# Altium PCB HV_Boost.PcbDoc
Units mil, origin at the board's own origin, x right, y up, seen from the top; angles counter-clockwise.
Board outline 7300 x 2800 mil, 4 copper layers (Power, Signal 1, Signal 2, GND), stack 23.756 mil thick; 60 components, 93 nets, 317 pads, 50 vias.
Unrouted connection lines stored in the file: 51.
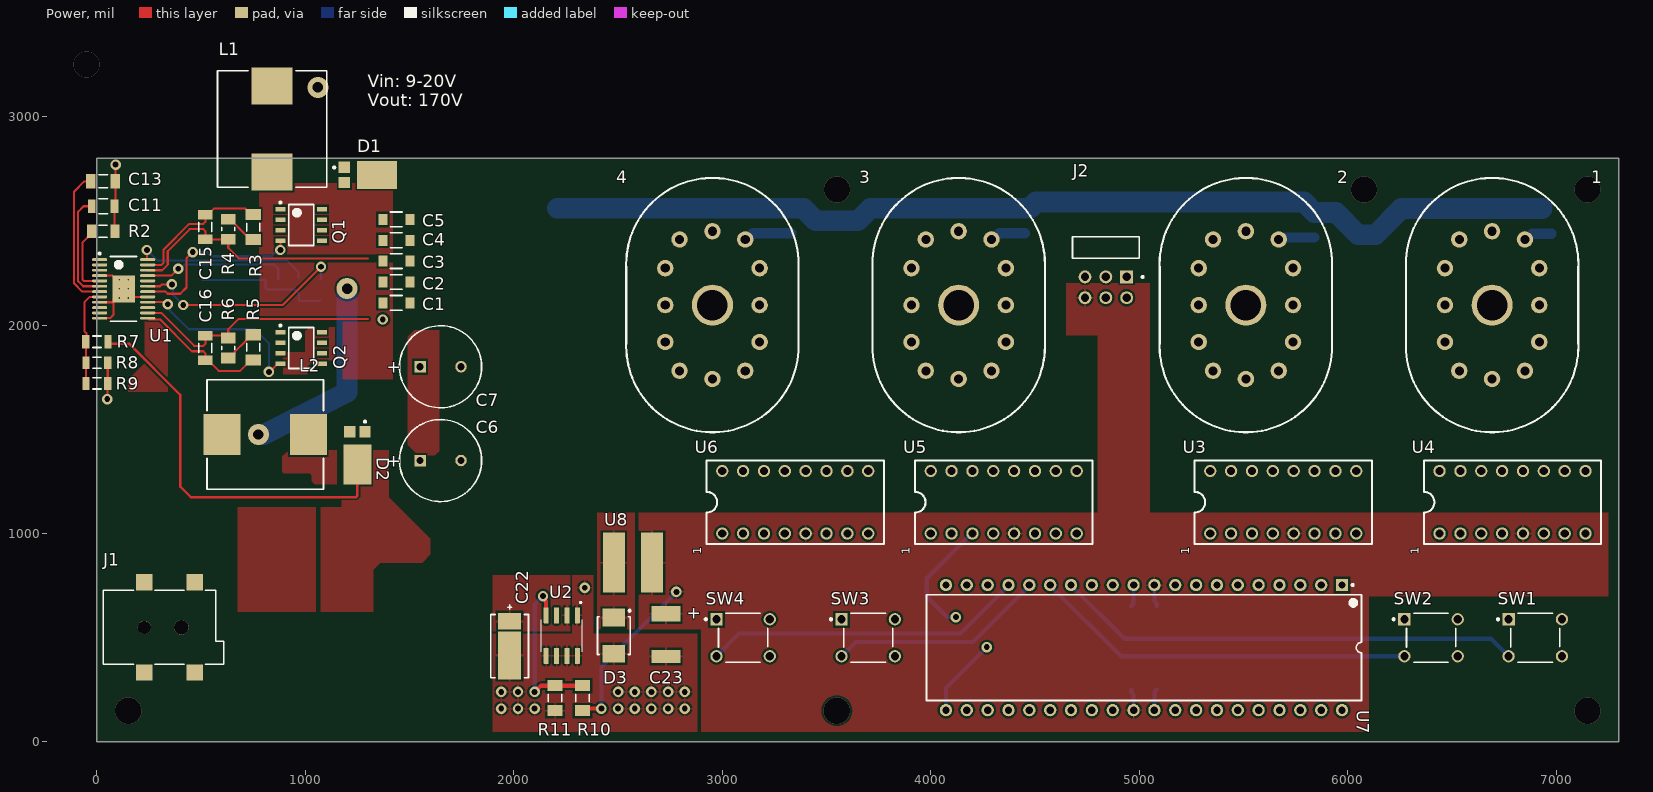
[diagram p0: Power view]
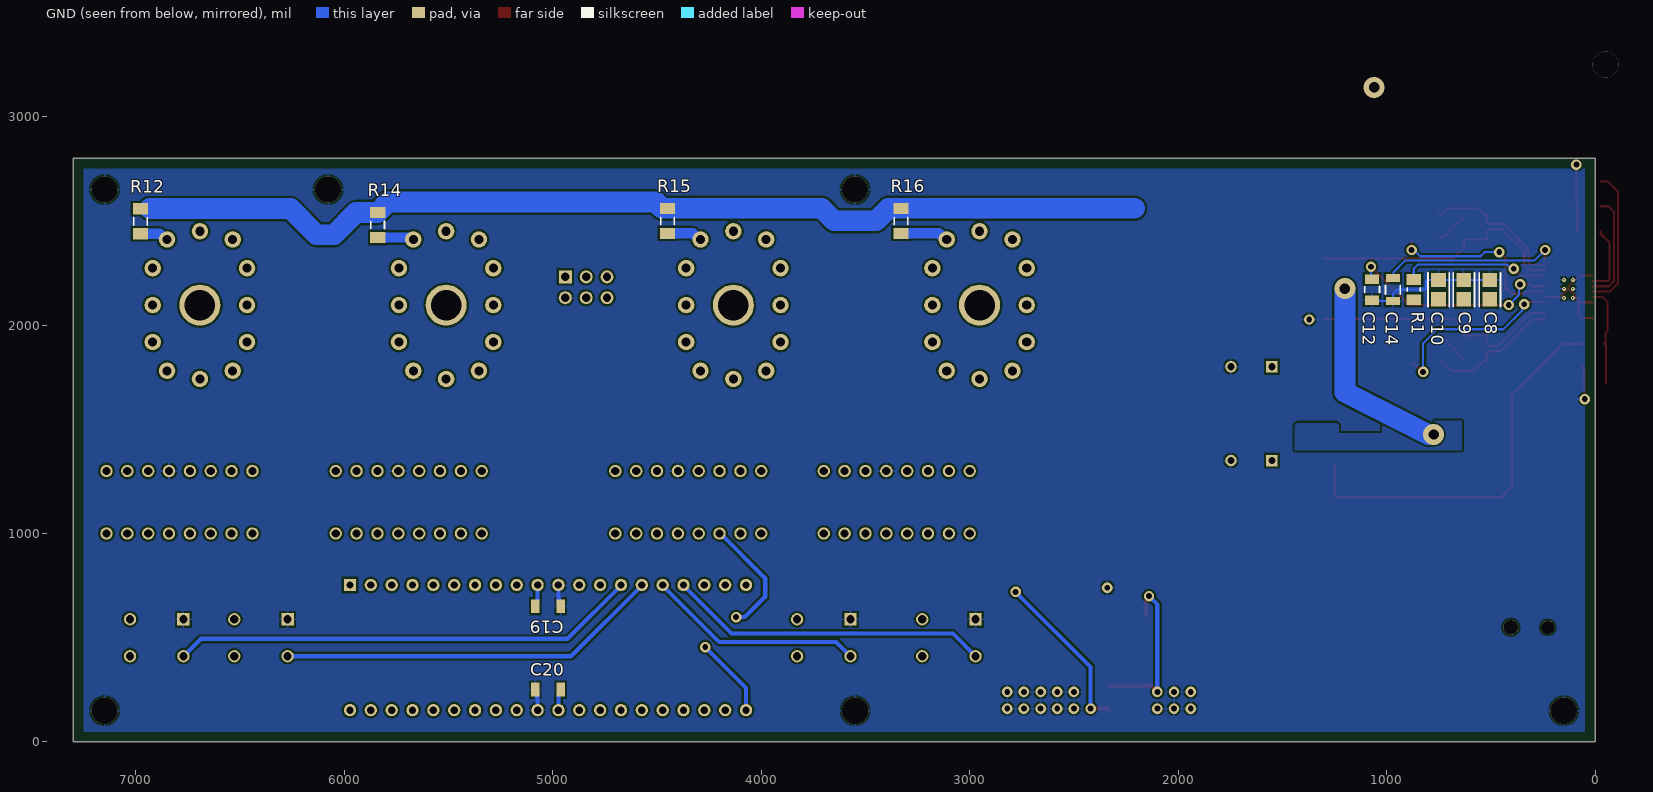
[diagram p1: GND view, seen from below]
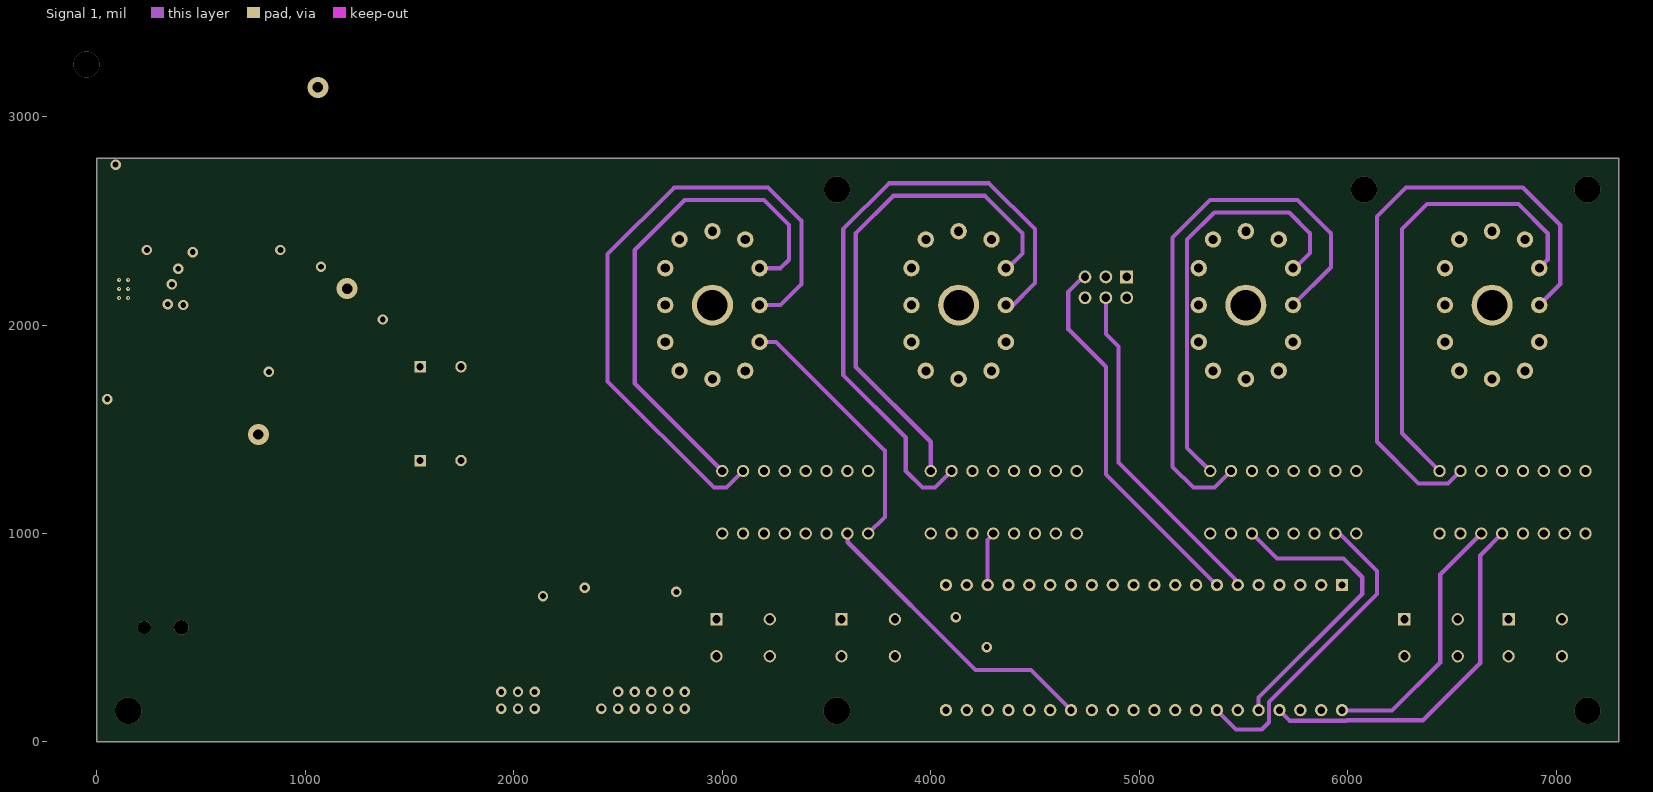
[diagram p2: Signal 1]
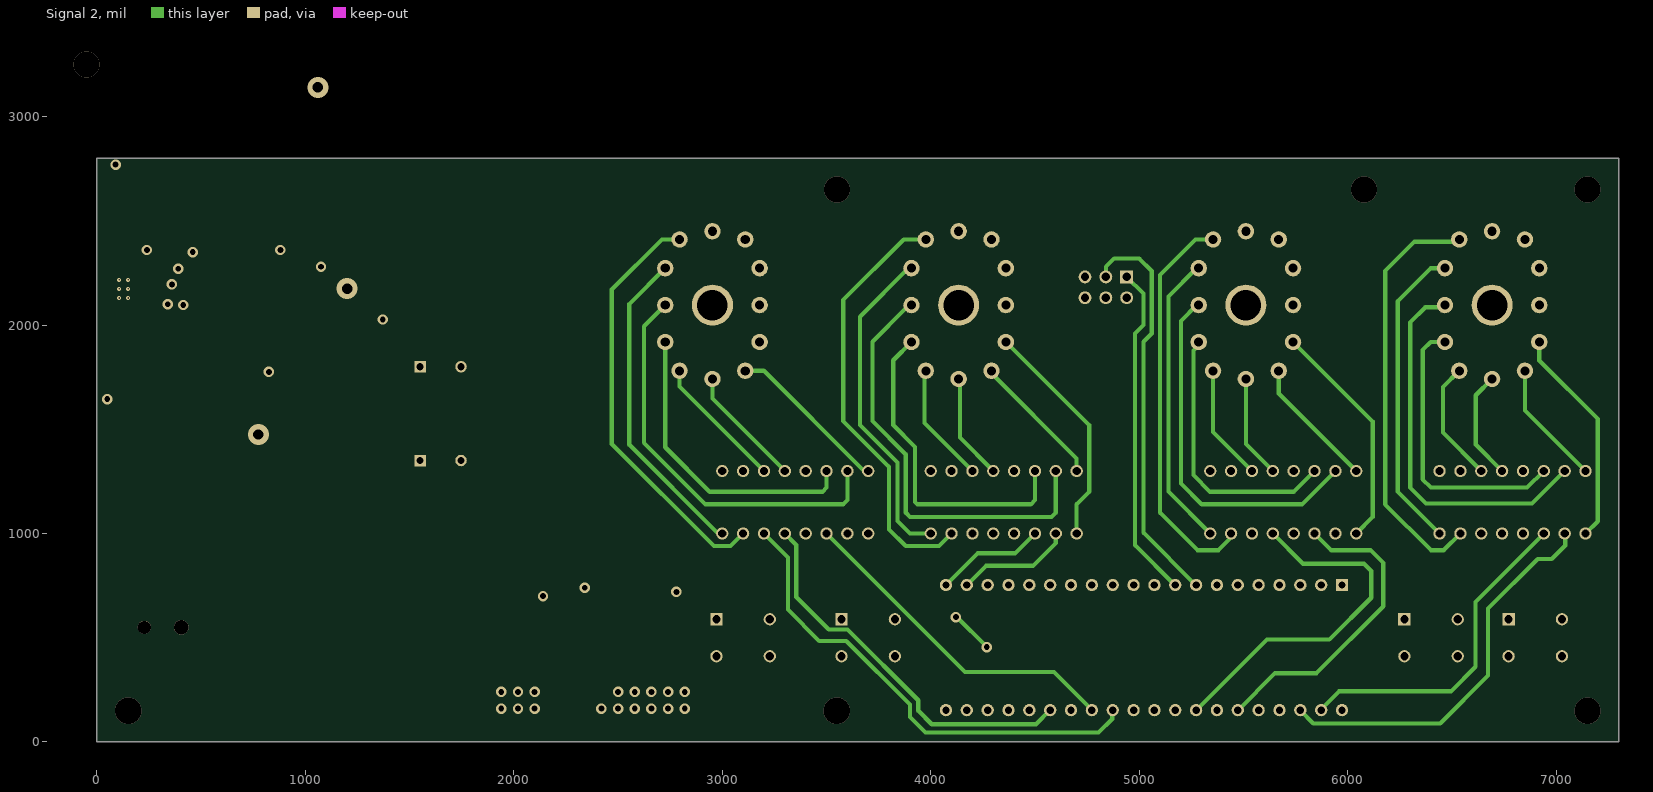
[diagram p3: Signal 2]
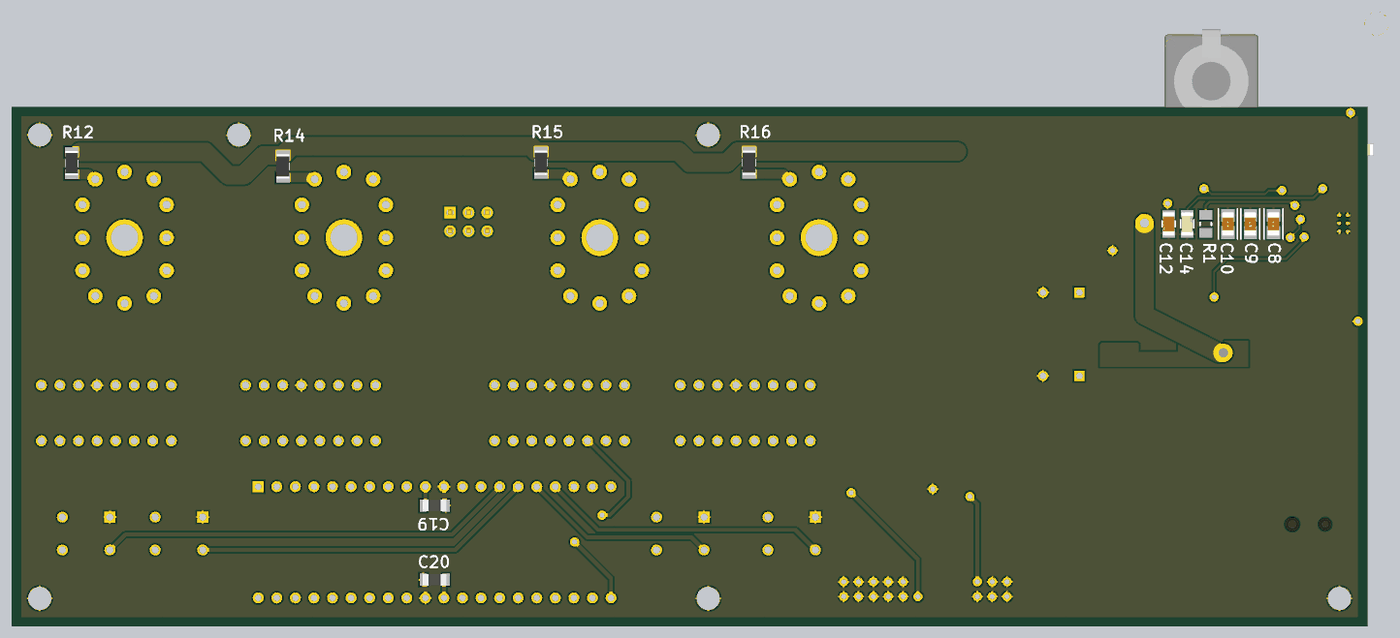
[diagram p4: 3D render of the assembled board from below, using the file's embedded part models]

## Layer stack, top to bottom
Top Solder: solder mask 0.4, Solder Resist, Dk 3.5
Power: signal copper 1.4
Dielectric 2: prepreg 2.8, PP-006, Dk 4.1
Signal 1: signal copper 1.378
Dielectric 1: dielectric 12.6, FR-4, Dk 4.8
Signal 2: signal copper 1.378
Dielectric 3: prepreg 2.8, PP-006, Dk 4.1
GND: signal copper 1.4
Bottom Solder: solder mask 0.4, Solder Resist, Dk 3.5

## Board outline
0,0 7300,0 7300,2800 0,2800

## Design rules (kind name [scope] priority, off if disabled: settings)
Clearance [All] p1: gap=10 ignorepadtopadclearanceinfootprint=FALSE except(0: Arc-Hole Track-Hole SMDPad-Hole THPad-Hole Via-Hole Fill-Hole Poly-Hole Region-Hole Text-Hole)
PolygonConnect [All] p1: connectstyle=Relief reliefconductorwidth=10 reliefentries=4 polygonreliefangle="90 Angle" airgapwidth=10
RoutingVias [All] p1: holewidth=28 width=50 viastyle="Through Hole" minholewidth=28 minwidth=50 maxholewidth=28 maxwidth=50
SolderMaskExpansion [All] p1: expansion=4 istentingtop=FALSE
Width [All] p1: maxlimit=100 minlimit=10 preferedwidth=10
30 further rules are at their usual default settings.

## Classes and differential pairs
component class TPS5402: C22 C23 D3 R10 R11 U2 U8
component class Buttons: SW1 SW2 SW3 SW4
component class ATMega1284p: C19 C20 U7
component class IN_12A: 1 2 3 4 R12 R14 R15 R16 U3 U4 U5 U6
component class LTC3862-2: C1 C2 C3 C4 C5 C6 C7 C8 C9 C10 C11 C12 C13 C14 C15 C16 D1 D2 L1 L2 Q1 Q2 R1 R2 R3 R4 R5 R6 R7 R8 R9 U1
component class Connectors: J1 J2

## Components (designator, comment, footprint, x,y, rotation, side; value= is the part's Value field where it differs from the comment)
1 "IN-12A" IN-12A 6692.91,2095.67 r0 top locked
2 "IN-12A" IN-12A 5511.81,2095.67 r0 top locked
3 "IN-12A" IN-12A 4133.86,2095.67 r0 top locked
4 "IN-12A" IN-12A 2952.76,2095.67 r0 top locked
C1 "6.8uF" FP-C3216-160-0_2-MFG 1436.61,2106.57 r180 top
C2 "6.8uF" FP-C3216-160-0_2-MFG 1436.61,2206.57 r180 top
C3 "6.8uF" FP-C3216-160-0_2-MFG 1436.61,2306.57 r180 top
C4 "6.8uF" FP-C3216-160-0_2-MFG 1436.61,2406.57 r180 top
C5 "6.8uF" FP-C3216-160-0_2-MFG 1436.61,2506.57 r180 top
C6 "ECA-2DM101" CAPPR65-500-1600X1000X1700 1648.43,1350 r0 top value=100µF
C7 "ECA-2DM101" CAPPR65-500-1600X1000X1700 1648.43,1800 r0 top value=100µF
C8 "6.8uF" FP-C3216-160-0_2-IPC_B 505,2170 r90 bottom
C9 "6.8uF" FP-C3216-160-0_2-IPC_B 630,2170 r90 bottom
C10 "6.8uF" FP-C3216-160-0_2-IPC_B 750.49,2170 r90 bottom
C11 "0.002uF" FP-C1206C-EB-MFG 30,2570 r180 top value="2,000 pF"
C12 "4.7uF" FP-GRM31C-0_2-e0_3_0_8-IPC_C 1070,2170 r270 bottom
C13 "CAP 10nF 100V" CAPC1206(3216)170_N 30,2690 r0 top value=10nF
C14 "0.001uF" FP-C1206C-EB-MFG 970,2170 r270 bottom value="1,000 pF"
C15 "CAP 10nF 500V 1206" CAPC1206(3216)170_N 520,2470 r270 top value=10nF
C16 "CAP 10nF 500V 1206" CAPC1206(3216)170_N 520,1890 r90 top value=10nF
C19 "Capacitor - 0.1uF - 1206" FOOTPRINT-1206-GEN 5023,651 r0 bottom value=0.1uF
C20 "Capacitor - 0.1uF - 1206" FOOTPRINT-1206-GEN 5023,251 r180 bottom value=0.1uF
C22 "47uF" FP-T528Z477M2R5ATE008-MFG 1980,460 r90 top
C23 "595D107X06R3C2T" 595D107X06R3C2T 2730,410 r0 top
D1 "PDS760-13" DIOD-POWERDI5-3_V 1300,2720 r0 top
D2 "PDS760-13" DIOD-POWERDI5-3_V 1250,1375 r270 top
D3 "SS22T3G" ONSC-SMB-2-403A-03_V 2480,510 r270 top
J1 "694106106102" 694106106102 300,550 r270 top
J2 "M20-9950345" FP-M20-9950345-MFG 4840,2370 r180 top locked
L1 "7443551181" WE-HCI-1365 840,2940 r270 top
L2 "7443551181" WE-HCI-1365 807.47,1475 r0 top
Q1 "SI4840DY-T1-E3" VISH-SOIC-8_A_V 980,2480 r0 top
Q2 "SI4840DY-T1-E3" VISH-SOIC-8_A_V 980,1890 r0 top
R1 "0 Ohm" RESC3216X89X64LL25T25 870,2170 r90 bottom
R2 "66.5k" RESC3216X70X50NL05T20 30,2450 r180 top
R3 "10" FP-CRCW1206-e3-IPC_A 750,2470 r270 top
R4 "0.005" RESC3216X89X64LL25T25 630,2460 r90 top
R5 "10" FP-CRCW1206-e3-IPC_A 750,1893.1 r90 top
R6 "0.005" RESC3216X89X64LL25T25 630,1890 r270 top
R7 "475k" RESC3216X60X45LL10T20 0,1920 r0 top
R8 "3.48k" RESC3216X70X50LL05T20 0,1819.51 r180 top
R9 "DNP" RESC3216X70X50LL05T20 0,1720 r180 top
R10 "Resistor 3.01k +/-1% 1206 250 mW" RESC3216X60X45ML15T20 2330,210 r270 top value=3.01k
R11 "Resistor 976 +/-1% 1206 250 mW" RESC3216X60X45ML15T20 2198.07,210 r90 top value=976
R12 "Resistor 80k +/-1% 1206 250 mW" RESC3216X60X45ML15T20 6978,2498 r90 bottom value=80k
R14 "Resistor 80k +/-1% 1206 250 mW" RESC3216X60X45ML15T20 5840,2480 r90 bottom value=80k
R15 "Resistor 80k +/-1% 1206 250 mW" RESC3216X60X45ML15T20 4450,2500 r90 bottom value=80k
R16 "Resistor 80k +/-1% 1206 250 mW" RESC3216X60X45ML15T20 3330,2500 r90 bottom value=80k
SW1 "1825910-6" TECO-1825910-6_V 6900,500 r0 top
SW2 "1825910-6" TECO-1825910-6_V 6400,500 r0 top
SW3 "1825910-6" TECO-1825910-6_V 3700,500 r0 top
SW4 "1825910-6" TECO-1825910-6_V 3100,500 r0 top
U1 "LTC3862EFE-1#PBF" LT-FE-24-EPV-AA_M 128.35,2173.31 r0 top
U2 "MIC4690YM-TR" TPS5402 2230,510 r270 top
U3 "K155ID1" Socket_DIP_16 5341.02,1000 r90 top
U4 "K155ID1" Socket_DIP_16 6441.02,1000 r90 top
U5 "K155ID1" Socket_DIP_16 4000,1000 r90 top
U6 "K155ID1" Socket_DIP_16 3000,1000 r90 top
U7 "ATmega1284P-PU" 40P6 5023,452.8 r270 top
U8 "CDRH6D38NP-180NC" CDRH6D38NP-180NC 2480,860 r0 top

## Footprints (in the part's own frame and the unit in brackets; to place one, negate y for a bottom-side part, rotate by r counter-clockwise, add the part's x,y. Pads: shape width x height; smd on the part's side, far side on the other; paste and mask are expansions set on the pad)
40P6 [mm] "40-Pin Ceramic Dual In-Line Package (CerDIP)"
  rect 1.5x1.5 hole 0.9: 1(-7.62,24.13)
  round 1.5 hole 0.9: 2(-7.62,21.59) 3(-7.62,19.05) 4(-7.62,16.51) 5(-7.62,13.97) 6(-7.62,11.43) 7(-7.62,8.89) 8(-7.62,6.35) 9(-7.62,3.81) 10(-7.62,1.27) 11(-7.62,-1.27) 12(-7.62,-3.81) 13(-7.62,-6.35) 14(-7.62,-8.89) 15(-7.62,-11.43) 16(-7.62,-13.97) 17(-7.62,-16.51) 18(-7.62,-19.05) 19(-7.62,-21.59) 20(-7.62,-24.13) 21(7.62,-24.13) 22(7.62,-21.59) 23(7.62,-19.05) 24(7.62,-16.51) 25(7.62,-13.97) 26(7.62,-11.43) 27(7.62,-8.89) 28(7.62,-6.35) 29(7.62,-3.81) 30(7.62,-1.27) 31(7.62,1.27) 32(7.62,3.81) 33(7.62,6.35) 34(7.62,8.89) 35(7.62,11.43) 36(7.62,13.97) 37(7.62,16.51) 38(7.62,19.05) 39(7.62,21.59) 40(7.62,24.13)
  silkscreen extent -7.74,-26.5 6.45,26.5, body extent -7.05,-26.47 7.05,26.47, height 5.72
595D107X06R3C2T [mm]
  rect 3.5x1.9 smd: 1(0,5.2)
  rect 3.5x1.6 smd: 2(0,0)
  body extent -1.73,-0.79 1.73,6.12, height 3
694106106102 [mm] "DC Power Jack Right Angled SMT ?6.4 with 4 soldering pads & pegs"
  rect 2x2 smd: 1(-5.5,4.3) 1(-5.5,-1.85) 2(5.5,-1.85) 3(5.5,4.3)
  round 1.6 hole 1.6 unplated: MH1(0,-1.85)
  round 1.8 hole 1.8 unplated: MH2(0,2.65)
  silkscreen extent -4.5,-6.85 4.5,7.85, body extent -6.25,-6.85 6.25,7.85, height 11.05
CAPC1206(3216)170_N [mm] "Chip Capacitor, Body 3.2x1.6mm, Height 1.7mm, IPC Medium Density"
  rect 1.15x1.8 smd: 1(-1.5,0) 2(1.5,0)
  silkscreen extent -0.55,-0.8 0.55,0.8, body extent -1.7,-0.9 1.7,0.9, height 1.7
CAPPR65-500-1600X1000X1700 [mm] "THD, 2-Leads, Dia 10mm, Body Length 16mm"
  rect 1.4x1.4 hole 0.9: 1(-2.5,0)
  round 1.4 hole 0.9: 2(2.5,0)
  silkscreen extent -5,-5 5,5, body extent -5,-5 4.95,5, height 17
CDRH6D38NP-180NC [mm]
  rect 2.65x7.3 smd: 1(0,0) 2(4.65,0)
  body extent -1.3,-3.63 5.94,3.63, height 4
DIOD-POWERDI5-3_V [mm] "SMD, 3-Leads, Body 3.975x5.375mm, Pitch 1.84mm"
  rect 1.4x1.39 smd: 1(-2.856,0.92) 2(-2.856,-0.92)
  rect 4.86x3.36 smd: 3(1.126,0)
  silkscreen extent -4.23,0.8 -3.98,1.04, body extent -2.69,-1.99 2.69,1.99, height 1.15
FOOTPRINT-1206-GEN [mm] "1/4 Watt"
  rect 1x1.7 smd: 1(-1.55,0) 2(1.55,0)
  body extent -1.6,-0.8 1.6,0.8, height 0.71
FP-C1206C-EB-MFG [mm]
  rect 0.95x1.7 smd paste+0 mask+0: 1(-1.4,0) 2(1.4,0)
  silkscreen extent -0.55,-0.9 0.55,0.9, body extent -2,-1 2,1, height 0.25
FP-C3216-160-0_2-IPC_B [mil]
  rect 69.05x71.11 smd paste+0 mask+0: 1(-46.3,0) 2(46.3,0)
  silkscreen extent -81,-51 81,51, body extent -63,-31 63,31, height 71
FP-C3216-160-0_2-MFG [mm]
  rect 1.1x1.35 smd paste+0 mask+0: 1(-1.65,0) 2(1.65,0)
  silkscreen extent -0.72,-0.9 0.72,0.9, body extent -2.3,-1 2.3,1, height 0.25
FP-CRCW1206-e3-IPC_A [mil]
  rect 53.39x73.16 smd paste+0 mask+0: 1(-60.08,0) 2(60.08,0)
  silkscreen extent -19,-31 19,31, body extent -106,-56 106,56, height 10
FP-GRM31C-0_2-e0_3_0_8-IPC_C [mil]
  rect 45.46x67.17 smd paste+0 mask+0: 1(-50.23,0) 2(50.23,0)
  silkscreen extent -16,-35 16,35, body extent -63,-31 63,31, height 71
FP-M20-9950345-MFG [mm]
  rect 1.57x1.57 hole 1.02 paste-1000 mask+0: 1(-2.54,3.53)
  round 1.57 hole 1.02 paste-1000 mask+0: 2(-2.54,6.07) 3(0,3.53) 4(0,6.07) 5(2.54,3.53) 6(2.54,6.07)
  silkscreen extent -4.61,-1.37 4.06,3.65, body extent -3.81,-7.37 3.81,6.39, height 5.28
FP-T528Z477M2R5ATE008-MFG [mm]
  rect 5.82x2.82 smd paste+0 mask+0: 1(-1.15,0)
  rect 2.02x2.82 smd paste+0 mask+0: 2(3.05,0)
  silkscreen extent -3.85,-2.3 5,2.3, body extent -4.18,-2.42 4.18,2.42, height 0.25
IN-12A [mm]
  round 2 hole 1.1: 1(4,8) 2(5.75,4.5) 3(5.75,0) 4(5.75,-4.5) 5(4,-8) 6(0,-9) 7(-4,-8) 8(-5.75,-4.5) 9(-5.75,0) 10(-5.75,4.5) 11(-4,8) 12(0,9)
  round 5 hole 3.7: ""(0,0)
  silkscreen extent -10.51,-15.49 10.51,15.49, body extent -10,-15.24 10,15.24, height 28
LT-FE-24-EPV-AA_M [mm] "SOP, 24-Leads, Body 7.9x4.5mm, Pitch 0.65mm, Thermal Pad 2.74x3.25mm, IPC Low Density"
  oval 1.85x0.35 smd: 1(-2.925,3.575) 2(-2.925,2.925) 3(-2.925,2.275) 4(-2.925,1.625) 5(-2.925,0.975) 6(-2.925,0.325) 7(-2.925,-0.325) 8(-2.925,-0.975) 9(-2.925,-1.625) 10(-2.925,-2.275) 11(-2.925,-2.925) 12(-2.925,-3.575) 13(2.925,-3.575) 14(2.925,-2.925) 15(2.925,-2.275) 16(2.925,-1.625) 17(2.925,-0.975) 18(2.925,-0.325) 19(2.925,0.325) 20(2.925,0.975) 21(2.925,1.625) 22(2.925,2.275) 23(2.925,2.925) 24(2.925,3.575)
  rect 2.74x3.25 smd: 25(0,0)
  silkscreen extent -3.05,-3.95 1.6,4.42, body extent -2.25,-3.95 2.25,3.95, height 1.2
ONSC-SMB-2-403A-03_V [mil] "Molded, 2-Leads, Body 4.6x3.95mm"
  rect 85x107.99 smd: 1(-87.01,0) 2(87.01,0)
  silkscreen extent -125,-79 91,81, body extent -91,-78 91,78, height 97
RESC3216X60X45LL10T20 [mm] "Chip Resistor, 2-Leads, Body 3.20x1.60mm, IPC High Density"
  rect 0.9x1.6 smd: 1(-1.35,0) 2(1.35,0)
  silkscreen extent -0.5,-0.7 0.5,0.7, body extent -1.65,-0.85 1.65,0.85, height 0.6
RESC3216X60X45ML15T20 [mm] "Chip Resistor, 2-Leads, Body 3.3x1.75mm, IPC Low Density"
  rect 1.35x1.85 smd: 1(-1.525,0) 2(1.525,0)
  silkscreen extent -0.45,-0.82 0.45,0.82, body extent -1.65,-0.87 1.65,0.87, height 0.6
RESC3216X70X50LL05T20 [mm] "Chip Resistor, 2-Leads, Body 3.20x1.60mm, IPC High Density"
  rect 0.9x1.55 smd: 1(-1.325,0) 2(1.325,0)
  silkscreen extent -0.5,-0.67 0.5,0.67, body extent -1.63,-0.82 1.62,0.82, height 0.7
RESC3216X70X50NL05T20 [mm] "Chip Resistor, 2-Leads, Body 3.20x1.60mm, IPC Medium Density"
  rect 1.1x1.65 smd: 1(-1.425,0) 2(1.425,0)
  silkscreen extent -0.5,-0.72 0.5,0.72, body extent -1.63,-0.82 1.62,0.82, height 0.7
RESC3216X89X64LL25T25 [mm] "Chip Resistor, 2-Leads, Body 3.20x1.60mm, IPC High Density"
  rect 1.3x1.75 smd: 1(-1.225,0) 2(1.225,0)
  silkscreen extent -0.2,-0.77 0.2,0.77, body extent -1.72,-0.92 1.73,0.92, height 0.89
Socket_DIP_16 [mm]
  round 1.5 hole 1: 1(0,0) 2(0,-2.54) 3(0,-5.08) 4(0,-7.62) 5(0,-10.16) 6(0,-12.7) 7(0,-15.24) 8(0,-17.78) 9(7.62,-17.78) 10(7.62,-15.24) 11(7.62,-12.7) 12(7.62,-10.16) 13(7.62,-7.62) 14(7.62,-5.08) 15(7.62,-2.54) 16(7.62,0)
  silkscreen extent -1.27,-19.68 8.89,1.91
TECO-1825910-6_V [mm] "Switch, 4-Leads, Body 5.99x5.99mm"
  rect 1.5x1.5 hole 0.99: 1(-3.25,2.25)
  round 1.5 hole 0.99: 2(3.25,2.25) 3(-3.25,-2.25) 4(3.25,-2.25)
  silkscreen extent -4.67,-2.99 2.99,3, body extent -3,-2.99 2.99,3, height 5
TPS5402 [mm]
  rrect25% 1.97x0.6 smd: 1(-2.47,1.905) 2(-2.47,0.635) 3(-2.47,-0.635) 4(-2.47,-1.905) 5(2.47,-1.905) 6(2.47,-0.635) 7(2.47,0.635) 8(2.47,1.905)
  silkscreen extent -4.14,-2.52 1.95,2.52
VISH-SOIC-8_A_V [mil] "SOIC, 8-Leads, Body 5x4mm, Pitch 1.27mm"
  rect 47.01x22.01 smd: 1(-99.49,75) 2(-99.49,25) 3(-99.49,-25) 4(-99.49,-75) 5(99.49,-75) 6(99.49,-25) 7(99.49,25) 8(99.49,75)
  silkscreen extent -104,-98 60,113, body extent -118,-98 118,98, height 69
WE-HCI-1365 [mm] "Inductor, 2-Leads, Body 13.2x12.8x6.5 mm"
  rect 4.5x5 smd: 1(-5.25,0) 2(5.25,0)
  silkscreen extent -7.1,-6.65 7.1,6.65, body extent -7.1,-6.4 7.1,6.4, height 6.49

## Part data
C1 C2 C3 C4 C5: library part CMP-08246-003319-1, "Multilayer Ceramic Capacitors 6.8uF ±20% 50V X5R SMD 1206 / C3216X5R1H685M160AB", Case Code (Imperial)=1206, Case Code (Metric)=3216, Dielectric=X5R, Dielectric Material=Ceramic, Max Operating Temperature=85°C, Min Operating Temperature=-55°C, Package Quantity=1, Tolerance=20%, Voltage Rating=50V, Capacitance=6.8uF, Case/Package=1206, Construction=Flat, Depth=1.6mm, Height=1.6mm, Lead Free="Lead Free", Length=3.2mm, Mount="Surface Mount", Packaging="Tape and Reel", Resistor Type=Ceramic, RoHS Compliant=Yes, Series=C, Termination=SMD/SMT, Thickness=0.071inch, Voltage Rating (DC)=50V, Weight=0.000571oz, Width=0.063inch
C6 C7: library part CMP-001-00034-5, "Aluminum Electrolytic Capacitor, 100 uF, +/- 20%, 200 V, -40 to 85 degC, 2-Pin THD, RoHS, Bulk", Capacitor Type=Electrolytic, Case/Package=Radial, Manufacturer=Panasonic, Max Operating Temperature=85°C, Min Operating Temperature=-40°C, Package Description="2-Pin Through Hole Device, Dia 10 mm, Body Length 16 mm", Package Quantity=200, Package Reference=CAPPR65-500-1600X1000X1700, Ripple Current=350mA, Tolerance=20%, Voltage Rating=100V, Datasheet URL=https://industrial.panasonic.com/cdbs/www-data/pdf/RDF0000/ABA0000C1047.pdf, Datasheet Version=Mar-16, Diameter=10mm, Lead Pitch=5mm, Manufacturer URL=http://www.panasonic.com/, Mounting Technology=TH, Packaging=Bulk, Pins=2, Ripple Current (AC)=350mA, RoHS Compliant=True
C8 C9 C10: library part CMP-08246-003250-1, "Multilayer Ceramic Capacitors 6.8uF ±10% 25V X7R SMD 1206 / C3216X7R1E685K160AB", Case Code (Imperial)=1206, Case Code (Metric)=3216, Dielectric=X7R, Dielectric Material=Ceramic, Max Operating Temperature=125°C, Min Operating Temperature=-55°C, Package Quantity=1, Tolerance=10%, Voltage Rating=25V, Capacitance=6.8uF, Case/Package=1206, Construction=Flat, Depth=1.6mm, Height=1.6mm, Lead Free="Lead Free", Length=3.2mm, Mount="Surface Mount", Number of Pins=2, Packaging="Tape and Reel", REACH SVHC="No SVHC", Resistor Type=Ceramic, RoHS Compliant=Yes, Series=C, Termination=SMD/SMT, Thickness=0.075inch, Voltage Rating (DC)=25V, Weight=0.000571oz, Width=0.063inch
C11: library part CMP-1037-02760-2, "C1206 2,000 pF C0G 5.00% 100 V / C1206C202J1GACTU", Capacitance="2,000 pF", Manufacturer=KEMET, Manufacturer Part Number=C1206C202J1GACTU, Package=C1206C-EB, Temperature="-55°C to +150°C", Temperature Characteristic=C0G, Temperature Coefficient=15%, Temperature Range High=+150°C, Temperature Range Low=-55°C, Tolerance=0.05, Voltage Rating="100 V", Automotive=Yes, Automotive Grade="Grade 0", Category=Cap, ComponentLink2Description=Datasheet, ComponentLink2URL=https://content.kemet.com/datasheets/KEM_C1007_X8R_ULTRA_150C_SMD.pdf, Device Class L1="Passive Components", Device Class L2=Capacitors, Device Class L3="Ceramic Capacitors", Height=0.88mm, Ipc Land Pattern Name=CAPC320160X78, Lead Free=Yes, Material=Ceramic, Mouser Description="Cap Ceramic 0.002uF 100V C0G 5% SMD 1206 125°C Plastic T/R", Octopart=https://octopart.com/c1206c202j1gactu-kemet-16997314, RoHS=TRUE
C12: library part CMP-1037-04923-3, "Chip Multilayer Ceramic Capacitors for General Purpose, 1206, 4.7uF, X7R, 15%, 10%, 50V", Case Code (Imperial)=1206, Case Code (Metric)=3216, Dielectric=X7R, Max Operating Temperature=125°C, Min Operating Temperature=-55°C, Package Quantity=2000, Tolerance=10%, Voltage=50V, Capacitance=4.7uF, Case/Package=1206, Depth=1.6mm, Height=1.6mm, Lead Free="Lead Free", Length=3.2mm, Material=Ceramic, Mount="Surface Mount", Packaging="Tape and Reel", Radiation Hardening=No, REACH SVHC="No SVHC", Termination=SMD/SMT, Thickness=0.071inch, Voltage Rating=50V, Voltage Rating (DC)=50V, Width=0.063inch
C13: library part CMP-1037-03519-1, "CAP 10nF 100V ±5% 1206 (3216 Metric) Thickness 1.7mm SMD", Case-EIA=1206, Case-Metric=3216, Rated Voltage="100 V", Tolerance=Â±5%, Max Thickness="1.7 mm", Technology=SMT
C14: library part CMP-03020-027220-1, "1206 1000pF Ceramic Multilayer Capacitor; 50VDC; 125degC; C0G Dielec; +/-5% SMD / C1206C102J5GACTU", Capacitance="1,000 pF", Manufacturer=KEMET, Manufacturer Part Number=C1206C102J5GACTU, Package=C1206C-EB, Temperature="-55°C to +150°C", Temperature Characteristic=C0G, Temperature Coefficient=15%, Temperature Range High=+150°C, Temperature Range Low=-55°C, Tolerance=0.05, Voltage Rating="50 V", Automotive=Yes, Automotive Grade="Grade 0", Category=Cap, ComponentLink2Description=Datasheet, ComponentLink2URL=https://content.kemet.com/datasheets/KEM_C1007_X8R_ULTRA_150C_SMD.pdf, Device Class L1="Passive Components", Device Class L2=Capacitors, Device Class L3="Ceramic Capacitors", Digikey Description="1206 1000pF Ceramic Multilayer Capacitor; 50VDC; 125degC; C0G Dielec; +/-5% SMD", Height=0.88mm, Ipc Land Pattern Name=CAPC320160X78, Lead Free=Yes, Material=Ceramic, Mouser Description="Multilayer Ceramic Capacitors MLCC - SMD/SMT 50volts 1000pF C0G 5%", Octopart=https://octopart.com/c1206c102j5gactu-kemet-139939, RoHS=TRUE
C15 C16: library part CMP-1037-03540-1, "CAP 10nF 500V ±10% 1206 (3216 Metric) Thickness 1.7mm SMD", Case-EIA=1206, Case-Metric=3216, Rated Voltage="500 V", Tolerance=Â±10%, Max Thickness="1.7 mm", Technology=SMT
C19 C20: library part CMP-001-00096-1, "CAP CER 0.1UF 50V X7R 1206", Part Number=1276-7034-1-ND, Design Item ID=Capacitor-Generic-1206, LatestRevisionNote="Re-released for DXP Platform.", PackageDescription="Radial Cap, Thru-Hole; 2 Leads; 0.3 in Pin Spacing", PackageReference=RAD-0.3, Published=8-Jun-2000, Publisher="Altium Limited", Source=Generic.SchLib, Type=Capacitor
C22: library part CMP-03017-000005-1, "CAP TANT 47UF 20% 20V 2917 / 595D476X0020D2T", Capacitance=470uF, Case Code (Imperial)=2917, Case Code (Metric)=7343, ESR (Equivalent Series Resistance)=8mR, Leakage Current=118uA, Max Operating Temperature=105°C, Min Operating Temperature=-55°C, Package Quantity=1, Ripple Current=6.4A, Tolerance=20%, Voltage Rating=2.5V, Case/Package=2917, Construction=Flat, Depth=4.3mm, Dissipation Factor=10%, Features="General Purpose", Height=1.7mm, Height - Seated (Max)=0.067inch, Length=7.3mm, Mount="Surface Mount", Packaging="Tape and Reel", Polarity=Polar, REACH SVHC="No SVHC", RoHS Compliant=Yes, Series="KO-CAP T528", Termination=SMD/SMT, Voltage Rating (DC)=2.5V, Width=0.169inch
C23: "595D107X06R3C2T / 100uF, 6.3V"
D1 D2: library part CMP-2000-07476-1, "Schottky Barrier Rectifier, 60 V, 7 A, -65 to 150 degC, 3-Pin SMD, RoHS, Tape and Reel", Average Rectified Current=7A, Case\/Package=SMD/SMT, Forward Voltage=620mV, Manufacturer="Diodes Inc", Max Forward Surge Current (Ifsm)=275A, Max Operating Temperature=150degC, Max Repetitive Reverse Voltage (Vrrm)=60V, Min Operating Temperature=-65degC, Package Description="3-Pin Surface Mount Device, Body 3.975 x 5.375 mm, Pitch 1.84 mm", Package Quantity=5000, Package Reference=POWERDI5-3, Peak Reverse Current=200uA, Contact Plating=Matte, Current Rating=7A, Datasheet URL=https://www.diodes.com/assets/Datasheets/ds30477.pdf, Datasheet Version="Rev. 13-2, 10/2012", Element Configuration=CommonAnode, Forward Current=7A, Height=1.15mm, Lead Free=LeadFree, Length=4.05mm, Manufacturer URL=http://www.diodes.com/, Mount=SurfaceMount, Mounting Technology=SurfaceMount, Number of Pins=5, Output Current=7A, Packaging=TapeandReel, Peak Non-Repetitive Surge Current=275A, Polarity=Standard, Radiation Hardening=No, REACH SVHC=NoSVHC, Reverse Voltage (DC)=60V, RoHSCompliant=true, Voltage Rating (DC)=60V, Weight=0.003386oz, Width=5.45mm
D3: library part CMP-1055-00373-1, "Schottky Power Rectifier, 2-Pin SMB, Pb-Free, Tape and Reel", Manufacturer="On Semiconductor", ComponentLink1Description="Manufacturer URL", ComponentLink1URL=http://www.onsemi.com/, ComponentLink2Description=Datasheet, ComponentLink2URL=http://www.onsemi.cn/pub_link/Collateral/SS24-D.PDF, ComponentLink3Description="Package Specification", ComponentLink3URL=http://www.onsemi.com/pub_link/Collateral/403A-03.PDF, Configuration=Single, DatasheetVersion="Rev. 4", IFSM Max (A)=75, Mounting Technology="Surface Mount", PackageDescription="2-Pin Small Molded Package, J-Bend Lead, Body 4.33 x 3.625 mm", PackageReference=SMB-2-403A-03, PackageVersion="Rev. J, 07/2012", Packing="Tape and Reel", PartNumber=SS22T3G, RoHS=TRUE
J1: library part CMP-1502-00177-1, "DC Power Jack Connector with 4 soldering pads & Pegs WR-DC, Male, Right Angled, SMT, 5 A, 24 V", Manufacturer="Wurth Elektronik", Operating Temperature=-40to85degC, Rated Current=5A, Working Voltage=24V, Datasheet URL=http://katalog.we-online.de/em/datasheet/6941xx106102.pdf, Gender=Male, Manufacturer URL=http://www.we-online.de, Mounting Technology=SMT, Opening Diameter=6.4mm, Orientation=RightAngled, Package Reference=694106106102, Packaging=TapeandReel, Part Number=694106106102, Plug Inner Diameter=2.05mm, Plug Outer Diameter=5.5mm, Publisher=WurthElektronik
J2: library part CMP-15831-000002-1, "CONN HEADER R/A 6POS 2.54MM", Current Rating=3A, Manufacturer=Harwin, Package=0, Temperature="-40°C to +105°C", Temperature Range High=+105°C, Temperature Range Low=-40°C, Automotive=No, Category=Conn, ComponentLink2Description=Datasheet, ComponentLink2URL=https://cdn.harwin.com/pdfs/M20-995.pdf, Conn Gender=Male, Conn Orientation="Right Angle", Contact Material=Gold,Nickel, Device Class L1=Connectors, Device Class L2="Headers and Wire Housings", Device Class L3=unset, Digikey Description="CONN HEADER R/A 6POS 2.54MM", Height=5.28mm, Ipc Land Pattern Name=DFN400X400X80-14, Lead Free=Yes, Manufacturer Part Number=M20-9950345, Mouser Description="Headers & Wire Housings 03+03 DIL HORIZONTAL PIN HEADER GOLD HT", Number Of Contacts=6, Number Of Rows=2, Octopart=https://octopart.com/m20-9950345-harwin-21265213, Pitch=2.54mm, RoHS=TRUE
L1 L2: library part CMP-1351-00013-1, "SMD Flat Wire High Current Inductor WE-HCI, L=18.0 µH", Inductance="18.0 ÂµH", Manufacturer="Wuerth Elektronik", ComponentLink1Description="Manufacturer URL", ComponentLink1URL=http://www.we-online.com, ComponentLink2Description=Datasheet, ComponentLink2URL=http://katalog.we-online.de/kataloge/eisos/media/pdf/7443551181.pdf, PackageDescription="Inductor, 2-Leads, Body 13.2 x 12.8 mm", PackageReference=WE-HCI-1365, PartNumber=7443551181
Q1 Q2: library part CMP-2000-07056-1, "N-Channel MOSFET, 40 V, -55 to 150 degC, 8-Pin SOIC, RoHS, Tape and Reel", Manufacturer=Vishay, Maximum Continuous Drain Current=10A, Maximum Drain Source Resistance=0.009, Maximum Drain Source Voltage=40V, Maximum Gate Source Voltage=20V, Maximum Operating Temperature=+150C, Maximum Power Dissipation=1.56W, Minimum Operating Temperature=-55C, Package Description="8-Pin Small Outline Integrated Circuit, Body 4.9 x 3.9 mm, Pitch 1.27 mm", Package Reference=SOIC-8, Package Type=SOICN, Category=PowerMOSFET, Channel Mode=Enhancement, Channel Type=N, Configuration=QuadDrain,Single,TripleSource, Datasheet URL=http://www.vishay.com/docs/71188/71188.pdf, Datasheet Version="Rev. E, 05/2009", Dimensions=5x4x1.55mm, Height=1.55mm, Length=5mm, Manufacturer URL=http://www.vishay.com/, Mounting Technology=SurfaceMount, Mounting Type=SurfaceMount, Number of Elements per Chip=1, Package URL=http://www.vishay.com/docs/71192/71192.pdf, Pin Count=8, Typical Gate Charge @ Vgs=18.5nCV@5, Typical Turn-Off Delay Time=50ns, Typical Turn-On Delay Time=15ns, Width=4mm
R1: library part CMP-2003-04332-1, "0 ohm 1206 / WSL120600000ZEA9", Manufacturer="Vishay Dale", Part Number=WSL120600000ZEA9
R2: library part CMP-2003-00464-1, "ERJ-8ENF6652V", Manufacturer=Panasonic, Part Number=ERJ-8ENF6652V
R3 R5: library part CMP-2003-04815-2, "RES Thick Film, 10Ω, 1%, 0.25W, 100ppm/°C, 1206 / CRCW120610R0FKEA", Case Code (Imperial)=1206, Case Code (Metric)=3216, Max Operating Temperature=155°C, Max Power Dissipation=250mW, Min Operating Temperature=-55°C, Resistance=10R, Temperature Coefficient=100ppm/°C, Tolerance=1%, Voltage Rating=200V, Case/Package=1206, Composition="Thick Film", Contact Plating=Tin, Depth=1.6mm, Features="Automotive AEC-Q200", Height=0.55mm, Lead Free="Lead Free", Length=3.2mm, Military Standard=Not, Number of Pins=2, Number of Terminations=2, Package Quantity=10, Packaging="Tape and Reel", Power Rating=250mW, Radiation Hardening=No, Termination=SMD/SMT, Voltage Rating (DC)=200V, Weight=0.000353oz, Width=0.063inch
R4 R6: library part CMP-2003-04338-1, "WSLP12065L000FEA", Manufacturer="Vishay Dale", Part Number=WSLP12065L000FEA
R7: library part CMP-2003-02210-1, "CRCW1206475KFKEA", Manufacturer="Vishay Dale", Part Number=CRCW1206475KFKEA
R8: library part CMP-2003-00318-1, "ERJ-8ENF3481V", Manufacturer=Panasonic, Part Number=ERJ-8ENF3481V
R9: library part CMP-2003-00318-1, Manufacturer=Panasonic, Part Number=ERJ-8ENF3481V
R10: library part CMP-009-00016-4, "Chip Resistor, 3.01KOhm, +/- 1%, 0.25 W, -55 to 155 degC, 1206 (3216 Metric)", Case/Package=1206, Max Operating Temperature=155°C, Min Operating Temperature=-55°C, Power=250mW, Tolerance=1%, Voltage Rating=200V, Mounting Technology=SM, Pins=2, RoHS Compliant=True
R11: library part CMP-009-00016-4, "Chip Resistor, 976Ohm, +/- 1%, 0.25 W, -55 to 155 degC, 1206 (3216 Metric)", Case/Package=1206, Max Operating Temperature=155°C, Min Operating Temperature=-55°C, Power=250mW, Tolerance=1%, Voltage Rating=200V, Mounting Technology=SM, Pins=2, RoHS Compliant=True
R12 R14 R15 R16: library part CMP-009-00016-4, "Chip Resistor, 80 KOhm, +/- 1%, 0.25 W, -55 to 155 degC, 1206 (3216 Metric)", Case/Package=1206, Max Operating Temperature=155°C, Min Operating Temperature=-55°C, Power=250mW, Tolerance=1%, Voltage Rating=200V, Mounting Technology=SM, Pins=2, RoHS Compliant=True
SW1 SW2 SW3 SW4: library part CMP-1684-00021-1, "Tact Switch, SPST-NO, 0.05 A, -35 to 85 degC, 4-Pin THD, RoHS, Bulk", Actuator Color=Black, Contact Rating @ Voltage=0.05A@24VDC, Dielectric Strength=500VAC, Manufacturer="TE Connectivity", Maximum AC Voltage Rating=N/A, Maximum Contact Resistance=100mOhm, Maximum DC Voltage Rating=24V, Minimum Insulation Resistance=100MOhm, Operating Temperature=-35to85C, Package Description="4-Pin Through Hole Device, Body 5.99 x 5.99 mm, Pitch 6.5 mm", Package Reference=THD, Actuator Length=1.4mm, Actuator Material=PolybutyleneTerephthalate, Actuator Style=RoundButton, Base Material=N/A, Body Orientation=Straight, Bushing Type=Unthreaded, Contact Material=CopperAlloy, Contact Plating=Silver, Datasheet URL=http://www.te.com/commerce/DocumentDelivery/DDEController?Action=showdoc&DocId=Customer+Drawing%7F1825910%7FC9%7Fpdf%7FEnglish%7FENG_CD_1825910_C9.pdf%7F1825910-6, Datasheet Version="Rev. C9", Dimension=5.99x5mm, Electrical Life=100000Cycles, Family=1825910, Function=MomentaryContact, Housing Material=N/A, Illumination=N/R, Manufacturer URL=http://www.te.com, Mechanical Life=100000Cycles, Mounting=ThroughHole, Packaging=N/A, Part No=1825910-6, Pole Throw Configuration=SPST, Product Weight=N/A, RoHS=Yes, Seal Description=N/A, Seal Location=N/A, Switch Configuration=OFF(ON), Terminal Type=PCPins, Thread Size=N/R
U1: library part CMP-0492-00585-1, "Multi-Phase Current Mode Step-Up DC/DC Controller, 10 V IntVcc, 7.5 V UV+, 7 V UV-, 24-pin SOP (FE-24-EPV-AA), -40 to 125 degC, Pb-Free", Frequency Sync Range="50kHz - 650kHz", Manufacturer="Linear Technology", ComponentLink1Description="Manufacturer URL", ComponentLink1URL=http://www.linear.com/, ComponentLink2Description=Datasheet, ComponentLink2URL=http://cds.linear.com/docs/en/datasheet/38621f.pdf, ComponentLink3Description="Package Specification", ComponentLink3URL=http://cds.linear.com/docs/en/packaging/TSSOP_24_05-08-1771.pdf, Mounting Technology="Surface Mount", Number of Outputs=1, PackageDescription="24-Pin Plastic TSSOP, Body 7.8 x 4.4 mm, Pitch 0.65 mm", PackageReference=FE-24, PackageVersion="Rev. B, 09/2010", PartNumber=LTC3862EFE-1#PBF, RoHS=TRUE
U7: library part CMP-0107-00007-2, "8-bit AVR Microcontroller, 128KB Flash, 4KB EEPROM, 16KB SRAM, 40-pin PDIP, Industrial Grade (-40°C to 85°C)", Code_JEDEC=MS-011-AC, ComponentLink1Description="Manufacturer URL", ComponentLink1URL=http://www.atmel.com/, ComponentLink2Description="ATmega164A/164PA/324A/324PA/644A/644PA/1284/1284P Datasheet", ComponentLink2URL=http://www.atmel.com/dyn/resources/prod_documents/doc8272.pdf, ComponentLink3Description="ATmega164A/164PA/324A/324PA/644A/644PA/1284/1284P Summary", ComponentLink3URL=http://www.atmel.com/dyn/resources/prod_documents/8272S.pdf, DatasheetVersion="revC, Jun-2011", PackageDescription="40-lead (0.600\"/15.24mm Wide) Plastic Dual Inline Package (PDIP)", PackageReference=40P6, PackageVersion="revB, Sep-2001"

## Via types
v1: diameter 50, hole 28, Power to GND, 34 vias
v2: diameter 125.98, hole 125.89, Power to GND, 7 vias
v3: diameter 19.68, hole 7.87, Power to GND, 6 vias
v4: diameter 100, hole 50, Power to GND, 3 vias

## Nets (pads, with @x,y where several pads share a name; then routed paths per layer and width w, separated by ;. In a path a pad name is that pad's centre, name@x,y a point inside that pad or via, vN(x,y) a via of type N, cw(c..) or ccw(c..) an arc to the next point about the centre after c; other vN are vias at no path point)
+5V: C19.2 C20.2 C23.1 J2.6 R10.2 U3.5 U4.5 U5.5 U6.5 U7.10 U7.30 U8.2 | length 1012.4
  Power w20: R10.2 2340.04,160 v1(2420,160)
  GND w20: v1(2420,160) 2420,360 v1(2780,720) ; C20.2 4961.98,237.22 4973,226.2 U7.30@4973,151 ; U7.10@5073,751 5073,675.8 5084.02,664.78 C19.2
+9V: C22.2 J1.1 U2.2 | length 971
  GND w100: v4(775,1475) 776.18,1474.99 800.04,1474.99 1200,1677.3 v4(1200,2175)
  other v4: 1060,3140
+12: C8.1 C9.1 C10.1 L1.1 L2.1 R1.1 U1.20
GND: C1.2 C2.2 C3.2 C4.2 C5.2 C6.2 C7.2 C8.2 C9.2 C10.2 C11.1 C12.2 C13.2 C14.2 C15.2 C16.2 C19.1 C20.1 C22.1 C23.2 D3.2 J1.2 J1.3 J2.2 R2.1 R4.1 R6.1 R8.1 R9.1 R11.1 SW1.1 SW2.1 SW3.1 SW4.1 U1.1 U1.2 U1.4 U1.9 U1.12 U1.14 U1.17 U1.22 U1.25 U2.1 U2.5 U2.6 U2.7 U2.8 U3.12 U4.12 U5.12 U6.12 U7.11 U7.31 | length 4470
  Power w10: U1.12 13.91,2033.28 63.28,2033.28 79.41,2049.41 U1.25@79.41,2114.33 ; U1.9 74.41,2109.33 U1.25@79.41,2114.33 ; U1.4 74.41,2237.28 128.35,2183.35 U1.25 ; v1(50,1645.08) R9.1@50,1720 ; R9.1@60,1720 60,1727.83 R9.1 52.17,1794 56.96,1798.8 R8.1@62.17,1798.8 ; R2.1 85.12,2450.98 C11.1 89.06,2573.94 C13.2 90,2690.95 v1(90,2770) ; U1.25@100.89,2135.81 U1.25@79.41,2114.33 ; U1.14 308.04,2058.15 466.19,1900 510,1900 520,1910 C16.2 619.17,1949.06 R6.1 630,1980 680,2030 1300,2030 ; U1.17 166.73,2134.92 U1.25 ; U1.22 312.69,2262.87 340,2290.18 340,2354.41 445.59,2460 510,2460 520,2450 C15.2 629.17,2410.94 R4.1 630,2370 680,2320 1300,2320 ; U1.25@79.41,2114.33 79.41,2124.37 U1.25
  GND w10: C8.2 C9.2 C10.2 804.14,2216.3 810,2210.45 810,2175.86 815.86,2170 950.31,2170 970,2150.32 C14.2 1065.11,2114.88 C12.2
  GND w20: C19.1 4971.66,660.68 4971.66,684.84 4973,686.18 U7.11@4973,751 ; U7.31@5073,151 5073,215.82 5074.34,217.16 5074.34,241.32 C20.1
  other v1: 1940,160 2020,160 2100,160 2500,160 2580,160 2660,160 2740,160 2820,160 1940,240 2020,240 2500,240 2580,240 2660,240 2740,240 2820,240 2340,740 1371.57,2026.57
  other v2: 150,150 3549.68,150 7150,150 3550,2650 6077.99,2650 7150,2650 -50,3250
  other v3: 106.69,2130 150,2130 106.69,2173.31 150,2173.31 106.69,2216.61 150,2216.61
HV+: C1.1 C2.1 C3.1 C4.1 C5.1 C6.1 C7.1 D1.3 D2.3 R7.2 R12.2 R14.2 R15.2 R16.2 | length 6802.5
  Power w12: R7.2@63.15,1910.98 154.02,1910.98 400,1665 400,1225 450,1175 1242.97,1175 1250,1182.03 D2.3
  GND w100: 2210.04,2560.04 R16.2 3389.96,2560.04 3450,2500 3650,2500 3710.04,2560.04 R15.2 4475.41,2560.04 4505.37,2590 5790.04,2590 R14.2 5943.35,2540.04 6050.27,2433.11 6133.11,2433.11 6258.64,2558.64 6932.41,2558.64
Net1_1: 1.1 R12.1 | length 138.9
  GND w50: 1.1 6858.17,2410.63 6885.5,2437.96 R12.1
Net1_2: 1.2 U4.16 | length 2226.7
  Signal 1 w20: U4.16 6260,1481.02 6260,2460 6380,2580 6820,2580 6960,2440 6960,2313.66 6919.29,2272.95 1.2
Net1_3: 1.3 U4.15 | length 3035.2
  Signal 1 w20: U4.15 6481.02,1240 6340,1240 6140,1440 6140,2520 6280,2660 6840,2660 7020,2480 7020,2196.38 1.3@6913.73,2090.1
Net1_4: 1.4 U4.8 | length 1059.2
  Signal 2 w20: 1.4 6919.29,1829.6 7200,1548.89 7200,1058.98 U4.8
Net1_5: 1.5 U4.9 | length 601.1
  Signal 2 w20: 1.5 6850.39,1590.63 U4.9
Net1_6: 1.6 U4.13 | length 526.1
  Signal 2 w20: 1.6 6614.64,1663.07 6614.64,1426.38 U4.13
Net1_7: 1.7 U4.14 | length 589.3
  Signal 2 w20: 1.7 6457.16,1702.44 6457.16,1483.86 U4.14
Net1_8: 1.8 U4.11 | length 1373.2
  Signal 2 w20: 1.8 6398.5,1918.5 6360,1880 6360,1260 6400,1220 6861.02,1220 U4.11
Net1_9: 1.9 U4.10 | length 1826.3
  Signal 2 w20: 1.9@6466.54,2085.04 6372.37,2085.04 6300,2012.67 6300,1220 6376,1144 6885.02,1144 U4.10
Net1_10: 1.10 U4.1 | length 1489.6
  Signal 2 w20: U4.1 6240,1201.02 6240,2113.94 6398.89,2272.83 1.10
Net1_11: 1.11 U4.2 | length 2018.7
  Signal 2 w20: 1.11@6535.43,2400 6320,2400 6180,2260 6180,1140 6400,920 6461.02,920 U4.2
Net2_1: 2.1 R14.1 | length 174.6
  GND w50: 2.1 5677.07,2410.63 5686.4,2419.96 R14.1
Net2_2: 2.2 U3.16 | length 2047.7
  Signal 1 w20: U3.16 5230,1411.02 5230,2410 5360,2540 5720,2540 5820,2440 5820,2345.45 5747.38,2272.83 2.2
Net2_3: 2.3 U3.15 | length 2776.1
  Signal 1 w20: U3.15 5361.02,1220 5260,1220 5160,1320 5160,2420 5340,2600 5760,2600 5920,2440 5920,2277.48 2.3
Net2_4: 2.4 U3.8 | length 1109.4
  Signal 2 w20: 2.4 6120,1536.69 6120,1078.98 U3.8
Net2_5: 2.5 U3.9 | length 634.7
  Signal 2 w20: 2.5 5669.29,1671.73 U3.9
Net2_6: 2.6 U3.13 | length 494.9
  Signal 2 w20: 2.6 5511.81,1429.21 U3.13
Net2_7: 2.7 U3.14 | length 558
  Signal 2 w20: 2.7 5354.33,1486.69 U3.14
Net2_8: 2.8 U3.11 | length 1304.6
  Signal 2 w20: 2.8 5285.43,1902.85 5260,1877.42 5260,1280 5340,1200 5741.02,1200 U3.11
Net2_9: 2.9 U3.10 | length 1745.2
  Signal 2 w20: 2.9 5276.24,2095.67 5200,2019.43 5200,1240 5300,1140 5781.02,1140 U3.10
Net2_10: 2.10 U3.1 | length 1421.7
  Signal 2 w20: 2.10 5276.24,2272.83 5140,2136.59 5140,1201.02 U3.1
Net2_11: 2.11 U3.2 | length 1924.8
  Signal 2 w20: 2.11 5270.63,2410.63 5100,2240 5100,1100 5280,920 5380,920 5433.55,973.55 5433.55,992.53 U3.2
Net3_1: 3.1 R15.1 | length 170.8
  GND w50: 3.1 4299.12,2410.63 4328.45,2439.96 R15.1
Net3_2: 3.2 U5.16 | length 2443.8
  Signal 1 w20: U5.16 4000,1440 3640,1800 3640,2440 3820,2620 4260,2620 4440,2440 4440,2343.41 4369.43,2272.83 3.2
Net3_3: 3.3 U5.15 | length 3095.9
  Signal 1 w20: U5.15 4020,1220 3960,1220 3880,1300 3880,1460 3580,1760 3580,2460 3800,2680 4280,2680 4500,2460 4500,2201.18 3.3@4383.86,2085.04
Net3_4: 3.4 U5.8 | length 1082.3
  Signal 2 w20: 3.4@4380,1900 4760,1520 4760,1200 4700,1140 U5.8
Net3_5: 3.5 U5.9 | length 650
  Signal 2 w20: 3.5 4291.34,1768.66 4700,1360 U5.9
Net3_6: 3.6 U5.13 | length 510.2
  Signal 2 w20: 3.6 4140,1735.2 4140,1460 U5.13
Net3_7: 3.7 U5.14 | length 578.6
  Signal 2 w20: 3.7 3970,1774.33 3970,1530 U5.14
Net3_8: 3.8 U5.11 | length 1574.7
  Signal 2 w20: 3.8 3820,1831.02 3820,1520 3925,1415 3925,1151.72 3936.72,1140 4480,1140 4500,1160 U5.11
Net3_9: 3.9 U5.10 | length 2102.3
  Signal 2 w20: 3.9@3931.1,2085.04 3925.08,2079.02 3879.02,2079.02 3720,1920 3720,1540 3880,1380 3880,1100 3900,1080 4580,1080 4600,1100 U5.10
Net3_10: 3.10 U5.1 | length 1583.3
  Signal 2 w20: 3.10 3892.83,2272.83 3660,2040 3660,1520 3840,1340 3840,1060 3900,1000 U5.1
Net3_11: 3.11 U5.2 | length 2065.9
  Signal 2 w20: 3.11 3870.63,2410.63 3580,2120 3580,1540 3800,1320 3800,1020 3880,940 4040,940 U5.2
Net4_1: 4.1 R16.1 | length 231.9
  GND w50: 4.1 3118.01,2410.63 3147.34,2439.96 R16.1
Net4_2: 4.2 U6.16 | length 2447.4
  Signal 1 w20: U6.16 2580,1720 2580,2360 2820,2600 3200,2600 3320,2480 3320,2313.31 3279.53,2272.83 4.2
Net4_3: 4.3 U6.15 | length 3179.5
  Signal 1 w20: U6.15 3020,1220 2960,1220 2450,1730 2450,2340 2770,2660 3220,2660 3380,2500 3380,2196.14 3279.53,2095.67 4.3
Net4_4: 4.4 U6.8 | length 1246.9
  Signal 1 w20: 4.4 3258.27,1918.5 3780,1396.77 3780,1080 U6.8
Net4_5: 4.5 U6.9 | length 788.9
  Signal 2 w20: 4.5 3199.29,1780.71 3672.53,1307.47 3692.53,1307.47 U6.9
Net4_6: 4.6 U6.13 | length 585.2
  Signal 2 w20: 4.6 2952.76,1647.24 U6.13
Net4_7: 4.7 U6.14 | length 648.4
  Signal 2 w20: 4.7 2795.28,1704.72 U6.14
Net4_8: 4.8 U6.11 | length 1455.3
  Signal 2 w20: 4.8 2726.38,1413.62 2940,1200 3480,1200 3500,1220 U6.11
Net4_9: 4.9 U6.10 | length 1948.1
  Signal 2 w20: 4.9 2680,2049.29 2625,1994.29 2625,1435 2920,1140 3580,1140 3600,1160 U6.10
Net4_10: 4.10 U6.1 | length 1547.2
  Signal 2 w20: 4.10@2730.96,2277.41 2554,2100.46 2554,1426 2972.53,1007.47 2992.53,1007.47 U6.1
Net4_11: 4.11 U6.2 | length 2022.8
  Signal 2 w20: 4.11 2710.63,2410.63 2470,2170 2470,1430 2960,940 3040,940 U6.2
NetC11_2: C11.2 U1.6 | length 522.8
  Power w10: C11.2 -64.14,2570 -90,2544.14 -90,2210 -66.1,2186.1 U1.6
NetC12_1: C12.1 U1.19 | length 1041.4
  Power w10: U1.19 303.34,2186.1 312.24,2195 v1(360,2195) ; v1(414.47,2096.35) 891.35,2096.35 v1(1075,2280)
  GND w10: v1(360,2195) 365.82,2189.18 365.82,2144.18 v1@415,2095 ; C12.1 1075,2225.23 v1(1075,2280)
NetC13_1: C13.1 U1.7 | length 681.2
  Power w10: C13.1 -29.89,2689.16 -60.84,2689.16 -110,2640 -110,2200 -70.51,2160.51 U1.7
NetC14_1: C14.1 U1.24 | length 848.9
  Power w10: v1(240,2360) 240,2315.8 241.75,2314.06 U1.24
  GND w10: v1(240,2360) 290,2310 910,2310 967.04,2252.96 967.04,2228.08 C14.1
NetD1_1: D1.1 D1.2 L1.2 Q1.5 Q1.6 Q1.7 Q1.8
NetD2_1: D2.1 D2.2 L2.2 Q2.5 Q2.6 Q2.7 Q2.8
NetD3_1: D3.1 U2.3 U8.1
NetJ2_1: J2.1 U7.9 | length 1609.7
  Signal 2 w20: J2.1 5020,2151.02 5020,2000 4980,1960 4980,944 U7.9@5173,751
NetJ2_3: J2.3 U7.8 | length 1944.8
  Signal 1 w20: U7.8@5269,751 U7.8@5273,751
  Signal 2 w20: J2.3 4840,2280 4880,2320 5000,2320 5060,2260 5060,1960 5020,1920 5020,1004 U7.8@5273,751
NetJ2_4: J2.4 U7.6 | length 1642.2
  Signal 1 w20: J2.4 4840,1957.77 4900,1897.77 4900,1340 5458.91,781.09 5458.91,775.66 5473,761.57 U7.6@5473,751
NetJ2_5: J2.5 U7.7 | length 1813.8
  Signal 1 w20: J2.5 4731.02,2231.02 4660,2160 4660,1980 4840,1800 4840,1284 U7.7@5373,751
NetQ1_4: Q1.4 U1.18 | length 871.6
  Power w10: U1.18 329.49,2160.51 340,2150 400,2150 430,2180 430,2320 v1(460,2350) ; v1(880,2360) 880,2404.49 Q1.4
  GND w10: v1(460,2350) 530,2350 550,2330 839.18,2330 869.18,2360 v1(880,2360)
NetQ2_4: Q2.4 U1.16 | length 884.9
  Power w10: U1.16 244.17,2110 319.18,2110 329.18,2100 v1(340,2100) ; v1(825,1775) 828.01,1775 868.01,1815 Q2.4
  GND w10: v1(340,2100) 347.65,2092.35 347.65,2072.35 440,1980 757.59,1980 825,1912.59 v1(825,1775)
NetR1_2: R1.2 U1.21 | length 708.4
  Power w10: U1.21 357.28,2237.28 v1(390,2270)
  GND w10: v1(390,2270) 400.82,2270 420.82,2290 850,2290 870,2270 R1.2
NetR2_2: R2.2 U1.5 | length 335.8
  Power w10: R2.2 -26.1,2439.17 -70,2395.28 -70,2218.28 -63.41,2211.69 U1.5
NetR7_1: R7.1 R8.2 R9.2 U1.8 | length 491.3
  Power w10: R7.1 -53.15,1820.49 R8.2 R9.2 ; R7.1@-42.17,1910 -50.64,1918.47 -50.64,1960.64 -60,1970 -60,2110 -35.08,2134.92 U1.8
NetR10_1: R10.1 R11.2 U2.4 | length 818
  Power w20: v1(2100,240) 2130.04,270.04 R11.2 R10.1 ; v1(2140,700) 2140,691.88 2155,676.88 U2.4
  GND w20: v1(2100,240) 2100,660 v1(2140,700)
NetSW1_3: SW1.3 U7.14 | length 2239.7
  GND w20: U7.14@4673,751 4929,495 6688.46,495 SW1.3
NetSW2_3: SW2.3 U7.15 | length 1839.7
  GND w20: U7.15@4573,751 4912.58,411.42 SW2.3
NetSW3_3: SW3.3 U7.16 | length 1041.6
  GND w20: SW3.3 3640.63,480 4202,480 U7.16@4473,751
NetSW4_3: SW4.3 U7.17 | length 1541.6
  GND w20: SW4.3 3080.63,520 4142,520 U7.17@4373,751
NetU3_3: U3.3 U7.36 | length 1460.8
  Signal 1 w20: U3.3 5661.02,880 5980,880 6070,790 6070,710 5573,213 U7.36@5573,151
NetU3_4: U3.4 U7.33 | length 1738.6
  Signal 2 w20: U7.33@5273,151 5613,491 5912,491 6113,692 6113,820 6078,855 5786.02,855 U3.4
NetU3_6: U3.6 U7.35 | length 1500.9
  Signal 2 w20: U7.35@5473,151 5652,330 5850,330 6171,651 6171,858 6109,920 5921.02,920 U3.6
NetU3_7: U3.7 U7.34 | length 1514.7
  Signal 1 w20: U7.34@5373,151 5464,60 5587.73,60 5622.53,94.8 5622.53,192.53 6140,710 6140,820 5967.47,992.53 5948.49,992.53 U3.7
NetU4_3: U4.3 U7.40 | length 1266.3
  Signal 1 w20: U7.40@5973,151 6213,151 6444,382 6444,802.98 U4.3
NetU4_4: U4.4 U7.37 | length 1763.6
  Signal 1 w20: U7.37@5673,151 5722.53,101.47 5993.52,101.47 5996.04,104 6362,104 6636,378 6636,894.98 U4.4
NetU4_6: U4.6 U7.39 | length 1612.1
  Signal 2 w20: U7.39@5864,148 5959,243 6495,243 6613,361 6613,671.98 U4.6
NetU4_7: U4.7 U7.38 | length 1886.5
  Signal 2 w20: U7.38@5773,151 5835,89 6444,89 6674,319 6674,640 6912,878 6979,878 7044,943 U4.7@7044,991
NetU5_3: U5.3 U7.21 | length 1167.7
  Signal 2 w20: v1(4121,599) 4125,599 v1(4269,455)
  GND w20: U7.21 4073,259 v1(4269,455) ; v1(4121,599) 4079,599 3981,697 3981,785 4196,1000 U5.3
NetU5_4: U5.4 U7.18 | length 258.4
  Signal 1 w20: U7.18 4273,968.76 4300,995.76 U5.4
NetU5_6: U5.6 U7.20 | length 529.4
  Signal 2 w20: U7.20 4225.2,905 4405,905 U5.6
NetU5_7: U5.7 U7.19 | length 555.8
  Signal 2 w20: U7.19 4265.2,845 4490,845 4600,955 U5.7
NetU6_3: U6.3 U7.29 | length 2318.1
  Signal 2 w20: U6.3 3315,885 3315,635 3464.86,485.14 3594.86,485.14 3900,180 3900,120 3975,45 4805,45 4870.81,110.81 4870.81,150.61 U7.29
NetU6_4: U6.4 U7.26 | length 1855.8
  Signal 2 w20: U6.4 3355,945 3355,695 3510.94,539.06 3600.94,539.06 3940,200 3940,150 4005,85 4505.2,85 U7.26
NetU6_6: U6.6 U7.28 | length 1623.9
  Signal 2 w20: U6.6 4165,335 4590.8,335 U7.28
NetU6_7: U6.7 U7.27 | length 1447.4
  Signal 1 w20: U6.7 3602.09,997.91 3602.09,957.91 4215,345 4480.8,345 U7.27
NetU7_22: U7.22
NetU7_23: U7.23
NetU7_24: U7.24
Q1_S: Q1.1 Q1.2 Q1.3 R3.2 R4.2 | length 160.7
  Power w10: R4.2 638.86,2508.23 715.47,2431.61 728.31,2431.61 R3.2
Q2_S: Q2.1 Q2.2 Q2.3 R5.2 R6.2 | length 172.1
  Power w10: R6.2 638.86,1841.77 659.45,1862.36 659.45,1869.45 718.42,1928.42 718.42,1931.49 740.11,1953.18 R5.2
SENSE1+: C15.1 R3.1 U1.23 | length 688.6
  Power w10: U1.23 310,2288.46 320,2298.46 320,2362.69 442.9,2485.59 510,2485.59 520,2495.59 C15.1 532.8,2529.06 563.74,2560 710.2,2560 740.11,2530.08 R3.1
SENSE2+: C16.1 R5.1 U1.13 | length 652.7
  Power w10: U1.13 248.5,2027.56 302.44,2027.56 455.59,1874.41 510,1874.41 520,1864.41 C16.1 532.8,1830.94 583.74,1780 687.1,1780 740.11,1833.02 R5.1
pads on no net: 1. 1.12 2. 2.12 3. 3.12 4. 4.12 J1.MH1 J1.MH2 SW1.2 SW1.4 SW2.2 SW2.4 SW3.2 SW3.4 SW4.2 SW4.4 U1.3 U1.10 U1.11 U1.15 U7.1 U7.2 U7.3 U7.4 U7.5 U7.12 U7.13 U7.25 U7.32

## Polygon pours and split planes (outlines as drawn)
+5V on Power (solid, pour order 26): 2900,50 6100,50 6100,700 7250,700 7250,1100 5050,1100 5050,2200 4650,2200 4650,1950 4800,1950 4800,1100 2600,1100 2600,540 2900,540
NetD3_1 on Power "GND" (solid, pour order 24): 2400,540 2580,540 2580,1100 2400,1100
+9V on Power "GND" (solid, pour order 23): 1900,520 2280,520 2280,800 1900,800
GND on Power "GND" (solid, pour order 22): 1900,520 1900,50 2880,50 2880,520 2380,520 2380,800 2280,800 2280,520
+12 on Power "GND" (solid, pour order 16): 778.19,2340 1420,2340 1420,2680 780,2680
Q2_S on Power "GND" (solid, pour order 11): 1044,1236 1150,1236 1150,1400 920,1400 890,1370 890,1296.84 896.84,1290 1020,1290 1030,1280 1030,1250
+12 on Power "GND" (solid, pour order 9): 1050,1125 1050,625 675,625 675,1125
NetD2_1 on Power "GND" (solid, pour order 8): 1175,1400 1400,1400 1400,1175 1575,1000 1600,975 1600,900 1560,860 1360,860 1325,825 1325,625 1075,625 1075,1125 1175,1125 1175,1397.36
NetD1_1 on Power "GND" (solid, pour order 6): 775,2300 780,2295 780,2020 1180,2020 1180,1740 1420,1740 1420,2300
Q1_S on Power "GND" (solid, pour order 5): 1140,1830 1040,1830 1010,1800 1010,1767.27 1006.26,1763.54 893.74,1763.54 893.74,1870 1000,1870 1000,1970 1020,1990 1140,1990 1140,1970
GND on Power "GND" (solid, pour order 4): 150,1680 340,1680 340,2220 230,2220 230,1817.52 152.48,1740 150,1740
GND on Power "GND" (solid, pour order 2): 1621.57,1375 1541.57,1375 1491.57,1425 1491.57,1945 1521.57,1975 1641.57,1975 1641.57,1395
GND on GND "GND" (solid, pour order 18): 50,2750 50,50 7250,50 7250,2750
+12 on GND "GND" (solid, pour order 10): 1020,1540 640,1540 640,1400 1440,1400 1440,1520 1430,1530 1240,1530 1230,1520 1230,1480 1020,1480

## Silkscreen, mask and mechanical layers (free items; w line width, h text height)
Top Overlay:
  text "Vin: 9-20V / Vout: 170V" at 1300,3050 h60

## Text inside footprints (layer, text, board x,y; h text height)
C6: Top Overlay "+" at 1390.56,1320.47 h59.06
C7: Top Overlay "+" at 1390.56,1770.47 h59.06
C23: Top Overlay "+" at 2830,590 h60
U3: Top Overlay "1" at 5241.02,900 h39.37 r90
U4: Top Overlay "1" at 6341.02,900 h39.37 r90
U5: Top Overlay "1" at 3900,900 h39.37 r90
U6: Top Overlay "1" at 2900,900 h39.37 r90